# EAGLE board btle_board_R0_2 (EAGLE 6.6.0)
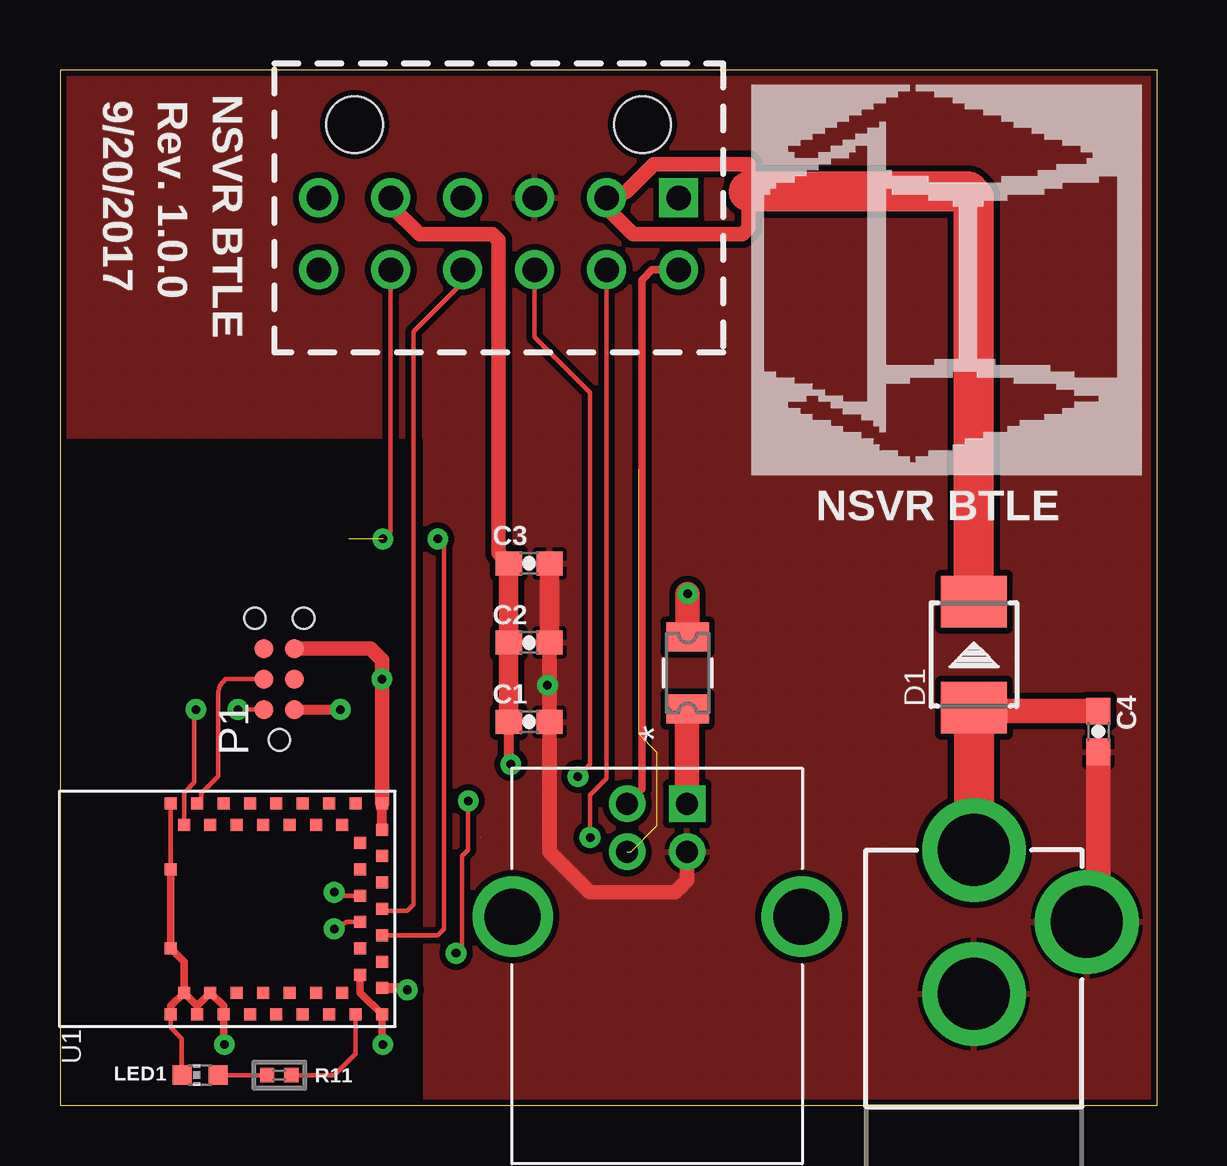
[diagram p0: board, top side]
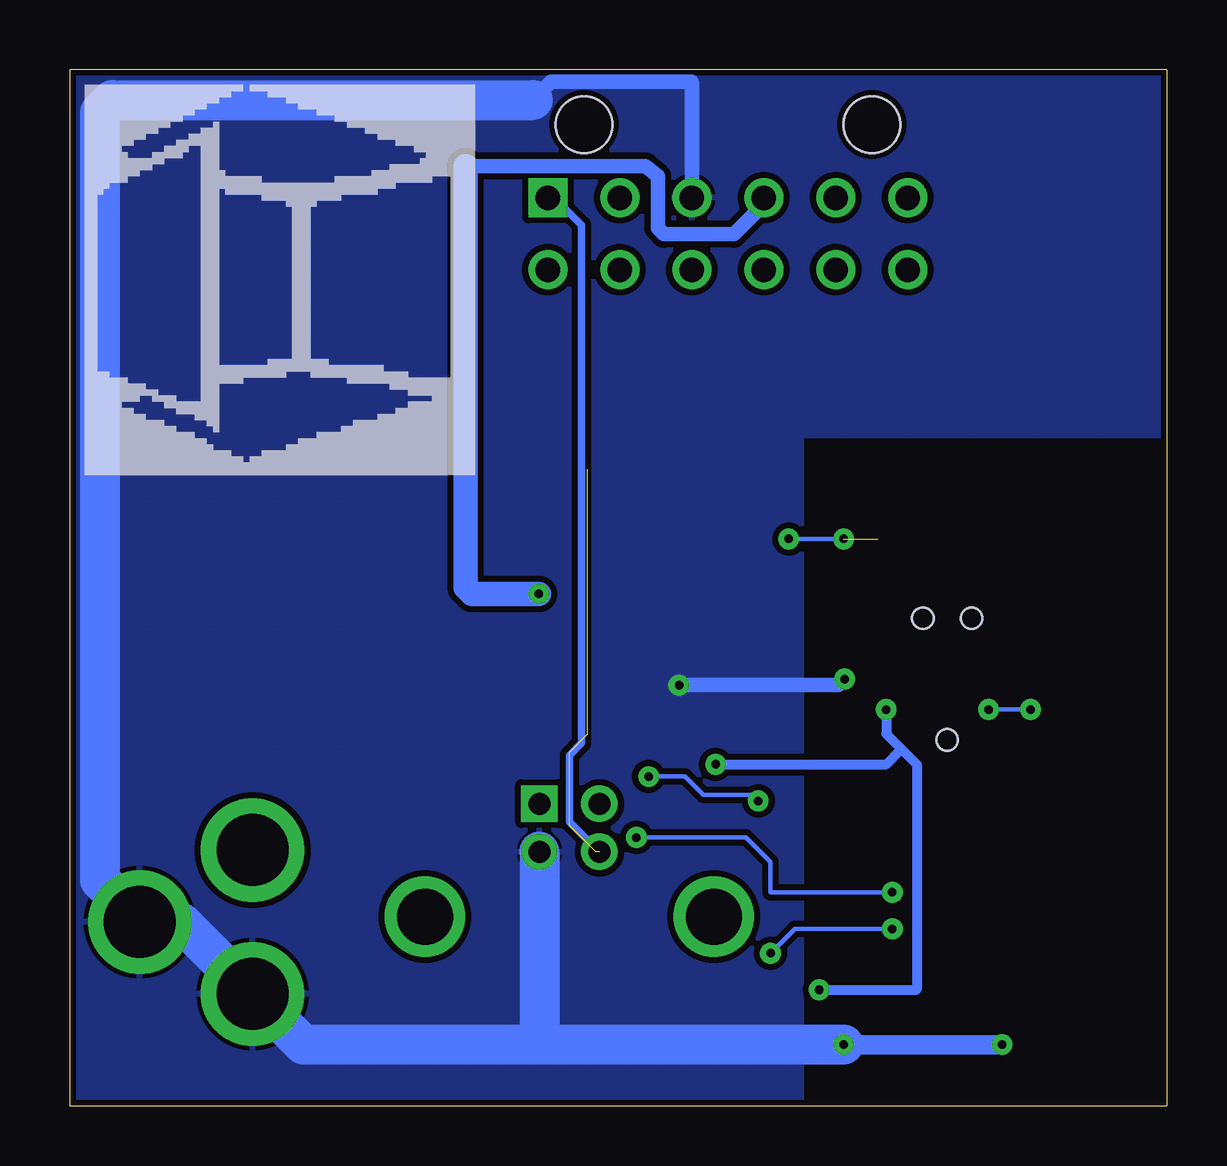
[diagram p1: board, bottom side, seen from below]

Size 45.72 x 43.18 mm. Coordinates in mm from the lower left corner, seen from the top.
Outline: 0,43.18 0,0 45.72,0 45.72,43.18 0,43.18
Copper layers (1*16): Top 0.035mm / dielectric 1.5mm / Bottom 0.035mm
Design rules "PatternAgents_7mil": minimum track width 7mil, minimum drill 14mil, track to track 7mil, track to pad 7mil, pad to pad 7mil, via to via 7mil, smd to smd 7mil, copper to edge 7mil, drill to drill 7mil, minimum pad ring 12mil, minimum via ring 10mil, stop-mask expansion 4mil, vias tented up to drill 25mil, thermal gap 7mil

## Footprints (pad centres in the part's own frame; a part is rotated, then mirrored left to right if it is on the bottom)
0603-CAP = smd 1.1 x 1: 1 -0.85,0; 2 0.85,0
DO-214AA = smd 2.159 x 2.743: + -2.21,0; - 2.21,0
1206LSERIES = smd 1.219 x 1.778: 1 -1.499,0; 2 1.499,0
CHIP-LED0603 = smd 0.8 x 0.8: A 0,-0.75; C 0,0.75
TC2030-MCP-NL = smd 0.787 x 0.787: 1 1.27,-0.635; 2 1.27,0.635; 3 2.54,-0.635; 4 2.54,0.635; 5 3.81,-0.635; 6 3.81,0.635 | hole 0.889: 0,0; 5.08,-1.016; 5.08,1.016
OST_USB-B1HSB6 = drill 0.92 square: 1 1.25,4.71 | drill 0.92: 2 -1.25,4.71; 3 -1.25,2.71; 4 1.25,2.71 | drill 2.33: P1 -6.02,0; P2 6.02,0
POWER_JACK_PTH = drill 2.997 pad 4.318: GND 0,7.7; GNDBREAK 4.7,10.7; PWR 0,13.7
44764-1201 = drill 1.02 square: P$1 -7.5,0 | drill 1.02: P$2 -4.5,0; P$3 -1.5,0; P$4 1.5,0; P$5 4.5,0; P$6 7.5,0; P$7 -7.5,3; P$8 -4.5,3; P$9 -1.5,3; P$10 1.5,3; P$11 4.5,3; P$12 7.5,3 | hole 2.36: -6,-3.05; 6,-3.05
EIA-0402 = smd 0.6 x 0.6: 1 -0.508,0; 2 0.508,0
BMD-300 = smd 0.5 x 0.5: P1 0.5,9.35; P2 1.4,8.8; P3 0.5,8.25; P4 1.4,7.7; P5 0.5,7.15; P6 1.4,6.6; P7 0.5,6.05; P8 1.4,5.5; P9 0.5,4.95; P10 1.4,4.4; P11 0.5,3.85; P12 1.4,3.3; P13 0.5,2.75; P14 1.4,2.2; P15 0.5,1.65; P16 0.5,0.55; P17 1.6,0.55; P18 2.15,1.45; P19 2.7,0.55; P20 3.25,1.45; P21 3.8,0.55; P22 4.35,1.45; P23 4.9,0.55; P24 5.45,1.45; P25 6,0.55; P26 6.55,1.45; P27 7.1,0.55; P28 7.65,1.45; P29 8.2,0.55; P30 9.3,0.55; P31 9.3,1.65; P32 8.4,2.2; P33 9.3,2.75; P34 8.4,3.3; P35 9.3,3.85; P36 8.4,4.4; P37 9.3,4.95; P38 8.4,5.5; P39 9.3,6.05; P40 8.4,6.6; P41 9.3,7.15; P42 8.4,7.7; P43 9.3,8.25; P44 8.4,8.8; P45 9.3,9.35; P46 6.55,9.35; P47 3.25,9.35

## Placement (x,y rotation side)
C1  0.1uF  [0603-CAP]  19.56,16 0 top
C2  10uF  [0603-CAP]  19.56,19.3 0 top
C3  10uF  [0603-CAP]  19.56,22.61 0 top
C4  10uF  [0603-CAP]  43.28,15.6 270 top
D1  28V-5A  [DO-214AA]  38.1,18.8 90 top
F1  1206L050YR  [1206LSERIES]  26.16,18.03 90 top
LED1  [CHIP-LED0603]  5.84,1.27 90 top
P1  [TC2030-MCP-NL]  9.14,15.24 90 top
P3  USB-B1HSB6  [OST_USB-B1HSB6]  24.89,7.87 0 top
P4  POWER_JACKPTH  [POWER_JACK_PTH]  38.1,-3.05 0 top
P9  44764-1201  [44764-1201]  18.29,37.85 180 top
R11  470  [EIA-0402]  9.14,1.27 180 top
U1  [BMD-300]  13.97,3.3 90 top
U$4  [NSVR_LOGO]  28.96,26.42 0 top
U$5  [NSVR_LOGO]  44.96,26.42 0 bottom

## Library data of the parts
C1-C4 R11 = PatternAgents-ProtoPads
D1 = Seeed-Diode-2016; MPN: SS54B
F1 = 1206L050; COPYRIGHT: Copyright C 2015 Accelerated Designs. All rights reserved; MANUFACTURER_PART_NUMBER: 1206L050YR; VENDOR: Littelfuse Inc
LED1 = led
P1 = tag-connect
P3 = USB-B1HSB6; AVAILABILITY: Warning; DESCRIPTION: Conn Usb Type b r/a Black; MF: On Shore Technology; MP: USB-B1HSB6; PACKAGE: None; PRICE: 0.42 USD
P4 = SparkFun-Connectors; PROD_ID: CONN-08197
P9 U$4 U$5 = nsvr
U1 = BMD-300

## Nets
3V3_EXT: C1.1 C2.1 C3.1 P1.1 P9.P$5 U1.P17
5V0: F1.2 P9.P$4
CTS_BMD: P9.P$10 U1.P23
GND: C1.2 C2.2 C3.2 C4.2 LED1.C P1.5 P3.4 P4.GND P4.GNDBREAK P9.P$3 U1.P1 U1.P2 U1.P3 U1.P4 U1.P5 U1.P16 U1.P18 U1.P29 U1.P30 U1.P45 U1.P46 U1.P47
I2C_SCL: P9.P$6
I2C_SDA: P9.P$12
LED1: LED1.A R11.2
LED_1: R11.1 U1.P15
RTS_BMD: P9.P$11 U1.P21
RXD_BMD: P9.P$8 U1.P24
SWCLK_BMD: P1.4 U1.P43
SWDIO_BMD: P1.2 U1.P44
TXD_BMD: P9.P$9 U1.P22
USB_DM: P3.2 P9.P$7
USB_DP: P3.3 P9.P$1
VBUS_IN: F1.1 P3.1
VIN: D1.- P9.P$2
VIN_DC: C4.1 D1.+ P4.PWR
VSS(GND): P1.3

## Tracks (layer width: path | path; a pad name or v marks a point on that pad's centre or on a via)
3V3_EXT  (via drill 0.36)
  Top 0.406: U1.P17 14.4,4.9 v14.48,4.83 | P1.1 v11.68,16.51 | C1.1 18.71,14.31 v18.8,14.22
  Top 0.61: P9.P$5 13.79,37.52 14.99,36.32 18.03,36.32 18.29,36.07 18.29,23.03 C3.1
  Top 0.813: C3.1 C2.1 C1.1
  Bottom 0.406: v14.48,4.83 10.41,4.83 10.41,14.22 11.05,14.86 | v11.68,16.51 11.68,15.49 11.05,14.86 | v18.8,14.22 11.68,14.22 11.05,14.86
5V0  (via drill 0.36)
  Top 1.016: v26.16,21.34 F1.2
  Bottom 0.61: P9.P$4 16.79,37.57 18.03,36.32 20.95,36.32 21.21,36.58 21.21,38.73 21.72,39.17 29.21,39.17 29.26,39.17
  Bottom 1.016: v26.16,21.34 28.96,21.34 29.21,21.59 29.21,39.17
CTS_BMD
  Top 0.178: U1.P23 13.49,8.13 14.48,8.13 14.73,8.38 14.73,32.26 16.79,34.31 P9.P$10
GND  (via drill 0.36)
  Top 0.178: U1.P46 U1.P45 | U1.P1 4.62,3.25 5.08,2.79 5.08,1.28 LED1.C
  Top 0.305: U1.P46 U1.P47 5.17,6 U1.P2 | 5.72,4.15 U1.P2 | U1.P1 4.62,4.15 U1.P2 | U1.P3 5.72,4.15 | 5.72,4.15 U1.P4 6.82,4.15 U1.P5 6.82,2.58 v6.86,2.54 | v13.46,2.54 13.42,2.58 U1.P16 12.52,4.7 U1.P18
  Top 0.406: U1.P29 U1.P30
  Top 0.61: P3.4 26.14,9.4 25.63,8.89 22.1,8.89 20.41,10.58 C1.2 20.41,17.44 v20.32,17.53 20.41,17.61 C2.2 | U1.P30 v13.42,17.78 13.42,18.58 12.95,19.05 P1.5
  Top 0.813: C2.2 C3.2
  Top 1.016: C4.2 43.28,8.13 P4.GNDBREAK
  Bottom 0.61: P9.P$3 19.79,42.65 19.81,42.67 25.65,42.67 26.42,41.91 | v20.32,17.53 13.67,17.53 v13.42,17.78
  Bottom 0.813: v6.86,2.54 v13.46,2.54
  Bottom 1.676: 26.42,41.91 43.94,41.91 44.45,41.4 44.45,9.4 42.8,7.75 P4.GNDBREAK 41.1,7.65 P4.GND 35.99,2.54 26.16,2.54 | v13.46,2.54 26.16,2.54 | P3.4 26.14,2.56 26.16,2.54
  pour Top (isolate 0.254, hatched): 15.24,0 45.72,0 45.72,43.18 0,43.18 0,27.94 15.24,27.94
  pour Bottom (isolate 0.254, hatched): 15.24,0 45.72,0 45.72,43.18 0,43.18 0,27.94 15.24,27.94
LED1
  Top 0.178: LED1.A R11.2
LED_1
  Top 0.178: U1.P15 12.32,2.16 11.43,1.27 R11.1
RTS_BMD  (via drill 0.36)  (1 unrouted)
  Top 0.178: U1.P21 15.74,7.1 16,7.37 16,23.37 v15.75,23.62 | P9.P$11 13.79,23.95 v13.46,23.62
  Bottom 0.178: v15.75,23.62 v13.46,23.62
RXD_BMD  (via drill 0.36)  (1 unrouted)
  Top 0.178: U1.P24 11.57,8.75 v11.43,8.89 | P9.P$8 22.79,13.64 22.1,12.95 v22.1,11.18
  Bottom 0.178: v11.43,8.89 16.51,8.89 16.51,10.16 17.53,11.18 v22.1,11.18
SWCLK_BMD
  Top 0.178: P1.4 6.91,17.78 6.66,17.5 6.6,17.2 6.6,13.72 5.89,13.01 5.89,12.78 U1.P43 5.84,12.72
SWDIO_BMD  (via drill 0.36)
  Top 0.178: 5.93,16.5 v5.66,16.51 5.59,16.18 5.59,13.46 5.17,13.04 U1.P44 | v7.42,16.51 P1.2
  Bottom 0.178: v5.66,16.51 v7.42,16.51
TXD_BMD  (via drill 0.36)
  Top 0.178: U1.P22 11.97,7.65 v11.43,7.37 | P9.P$9 19.79,32.03 22.1,29.72 22.1,14.22 v21.59,13.72 | v17.02,12.7 17.02,10.67 16.76,10.41 16.76,6.6 v16.51,6.35
  Bottom 0.178: v11.43,7.37 15.49,7.37 v16.51,6.35 | v21.59,13.72 20.07,13.72 19.3,12.95 17.27,12.95 v17.02,12.7
USB_DM
  Top 0.305: P9.P$7 24.69,34.85 24.26,34.42 24.26,13.2 P3.2
USB_DP  (5 unrouted)
  Bottom 0.305: P9.P$1 25.53,37.85 24.38,36.7 24.38,15.11 24.89,14.61 24.89,11.83 P3.3
VBUS_IN
  Top 1.016: P3.1 26.14,16.52 F1.1
VIN
  Top 0.61: 22.86,37.85 22.86,37.34 23.88,36.32 28.45,36.32 28.7,36.58 28.7,38.1 28.7,39.24 24.77,39.24 23.62,38.1 23.04,37.85 P9.P$2
  Top 1.676: D1.- 38.1,37.85 37.85,38.1 28.7,38.1
VIN_DC
  Top 1.016: C4.1 38.24,16.45 D1.+
  Top 1.676: D1.+ P4.PWR

## Text on the board
tPlace: 9/20/2017 | Rev. 1.0.0 | NSVR BTLE | NSVR BTLE